# Altium PCB 6_LDCU_connector board(V21_zb).PcbDoc (part 4 of 4)
Units mil, origin at the board's own origin, x right, y up, seen from the top; angles counter-clockwise.
Board outline 11811.02 x 4135 mil, 2 copper layers (Top, Bottom), stack 12.7 mil thick; 37 components, 473 nets, 963 pads, 1 vias.
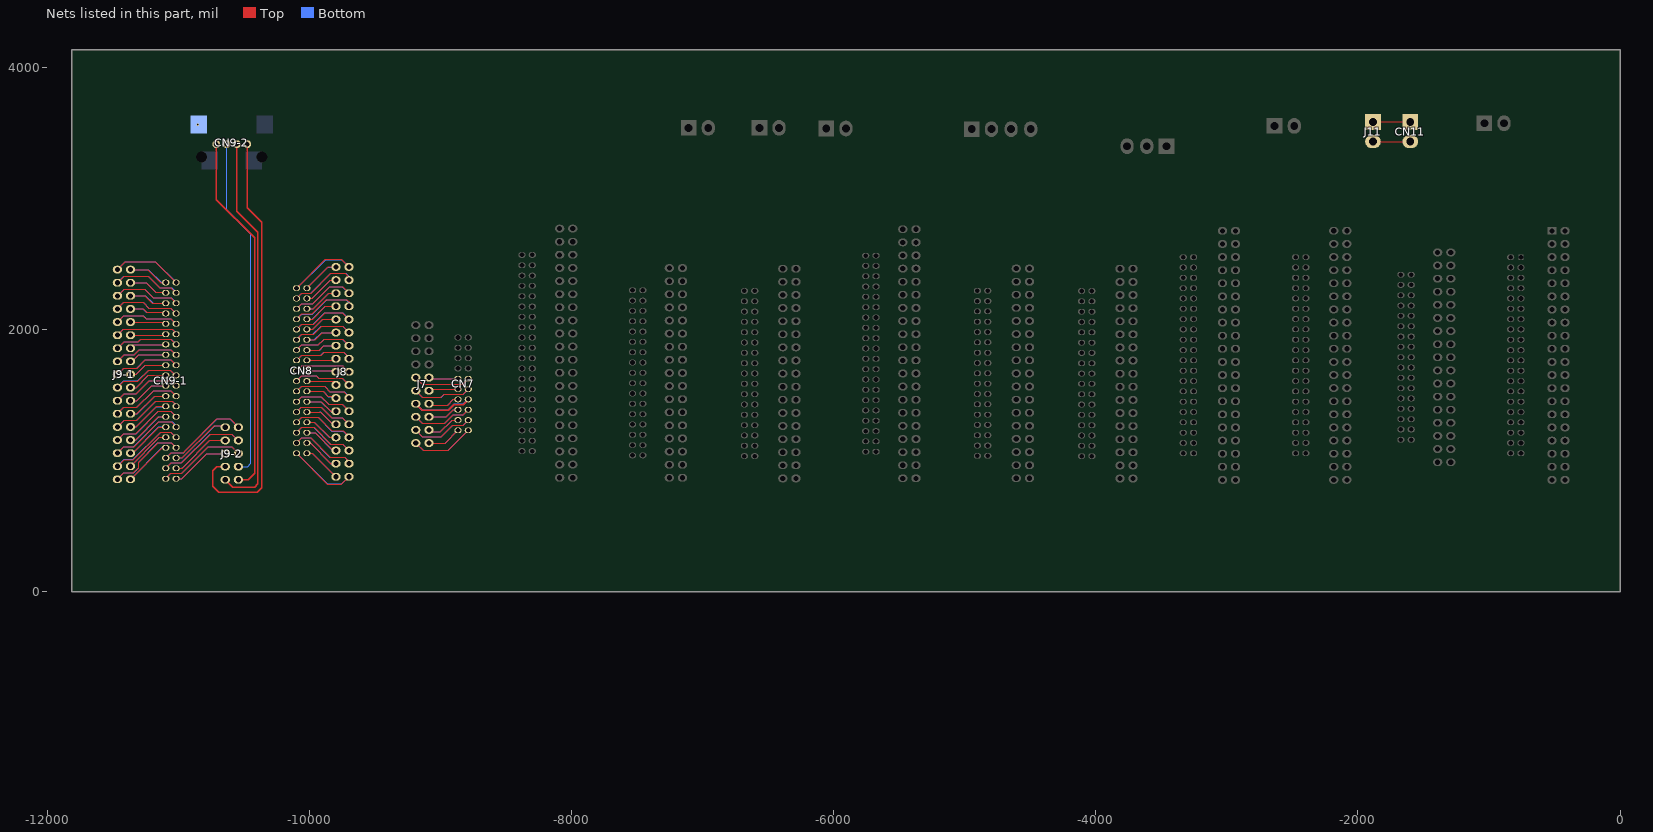
[diagram p4: the nets of this part, all layers, seen from the top]

## Via types
v1: diameter 20, hole 14, Top to Bottom, 1 vias

## Nets (pads, with @x,y where several pads share a name; then routed paths per layer and width w, separated by ;. In a path a pad name is that pad's centre, name@x,y a point inside that pad or via, vN(x,y) a via of type N, cw(c..) or ccw(c..) an arc to the next point about the centre after c; other vN are vias at no path point) (continued)
CN7_P9: CN7.9 J7.9 | length 876.5
  Top w7.87: J7.9@-9187.2,1635.32 -9136.81,1584.92 -8827.76,1584.92 CN7.9@-8786.81,1625.87
  Bottom w7.87: J7.9@-9187.2,1635.32 -9136.81,1584.92 -8827.76,1584.92 CN7.9@-8786.81,1625.87
CN7_P10: CN7.10 J7.10 | length 454.6
  Top w7.87: J7.10@-9087.2,1635.32 -9087.2,1630.98 -9082.09,1625.87 CN7.10@-8865.55,1625.87
  Bottom w7.87: J7.10@-9087.2,1635.32 -9079.33,1627.44 -9079.33,1625.87 CN7.10@-8865.55,1625.87
CN7_P11: CN7.11 J7.11 | length 894.7
  Top w7.87: J7.11@-9187.2,1535.32 -9136.42,1484.53 -8995.08,1484.53 -8971.85,1507.76 -8826.18,1507.76 CN7.11@-8786.81,1547.13
  Bottom w7.87: J7.11@-9187.2,1535.32 -9136.42,1484.53 -8994.29,1484.53 -8971.46,1507.36 -8826.57,1507.36 CN7.11@-8786.81,1547.13
CN7_P12: CN7.12 J7.12 | length 485.6
  Top w7.87: J7.12@-9087.2,1535.32 -9079.33,1527.44 -9074.21,1527.44 -9074.21,1547.13 CN7.12@-8865.55,1547.13
  Bottom w7.87: J7.12@-9087.2,1535.32 -9089.17,1533.35 -9089.17,1527.05 -9069.09,1547.13 CN7.12@-8865.55,1547.13
CN7_P13: CN7.13 J7.13 | length 951.1
  Top w7.87: -8815,1440.2 CN7.13@-8786.81,1468.39
  Top w10: J7.13@-9187.2,1435.32 -9137.2,1385.32 -8940.75,1385.32 -8897.05,1429.02 -8826.18,1429.02 -8815,1440.2 CN7.13@-8786.81,1468.39
  Bottom w10: J7.13@-9187.2,1435.32 -9136.89,1385 -8940,1385 -8895,1430 -8825,1430 CN7.13@-8786.81,1468.19
CN7_P14: CN7.14 J7.14 | length 499.2
  Top w7.87: J7.14@-9087.2,1435.32 -9076.97,1425.08 -8944.29,1425.08 -8900.98,1468.39 CN7.14@-8865.55,1468.39
  Bottom w7.87: J7.14@-9087.2,1435.32 -9091.14,1431.38 -9091.14,1425.08 -8943.9,1425.08 -8900.59,1468.39 CN7.14@-8865.55,1468.39
CN7_P15: CN7.15 J7.15 | length 929.4
  Top w7.87: J7.15@-9187.2,1335.32 -9138.39,1286.5 -8964.76,1286.5 -8901.5,1349.76 -8826.69,1349.76 ; -8827.36,1349.09 -8826.69,1349.76 ; CN7.15@-8786.81,1389.65 -8826.69,1349.76
  Bottom w7.87: J7.15@-9187.2,1335.32 -9138.78,1286.89 -8965.16,1286.89 -8902.28,1349.76 -8826.69,1349.76 ; -8828.15,1348.31 -8826.69,1349.76 ; CN7.15@-8786.81,1389.65 -8826.69,1349.76
CN7_P16: CN7.16 J7.16 | length 488.3
  Top w7.87: J7.16@-9087.2,1335.32 -8955.31,1335.32 -8900.98,1389.65 CN7.16@-8865.55,1389.65
  Bottom w7.87: J7.16@-9087.2,1335.32 -8955.71,1335.32 -8901.38,1389.65 CN7.16@-8865.55,1389.65
CN7_P17: CN7.17 J7.17 | length 947.2
  Top w7.87: J7.17@-9187.2,1235.32 -9136.81,1184.92 -8991.54,1184.92 -8904.92,1271.54 -8826.18,1271.54 CN7.17@-8786.81,1310.91
  Bottom w7.87: J7.17@-9187.2,1235.32 -9136.42,1184.53 -8991.54,1184.53 -8904.53,1271.54 -8826.18,1271.54 CN7.17@-8786.81,1310.91
CN7_P18: CN7.18 J7.18 | length 541.1
  Top w7.87: J7.18@-9087.2,1235.32 -9072.24,1220.35 -8999.41,1220.35 -8908.86,1310.91 CN7.18@-8865.55,1310.91
  Bottom w7.87: J7.18@-9087.2,1235.32 -9088.39,1234.13 -9088.39,1220.35 -8999.8,1220.35 -8909.25,1310.91 CN7.18@-8865.55,1310.91
CN7_P19: CN7.19 J7.19 | length 973
  Top w7.87: J7.19@-9187.2,1135.32 -9131.69,1079.8 -8939.17,1079.8 CN7.19@-8786.81,1232.17
  Bottom w7.87: J7.19@-9187.2,1135.32 -9131.69,1079.8 -8939.57,1079.8 -8787.2,1232.17 CN7.19@-8786.81,1232.17
CN7_P20: CN7.20 J7.20 | length 523.5
  Top w7.87: J7.20@-9087.2,1135.32 -8962.4,1135.32 CN7.20@-8865.55,1232.17
  Bottom w7.87: J7.20@-9087.2,1135.32 -8962.4,1135.32 CN7.20@-8865.55,1232.17
CN8_P1: CN8.1 J8.1 | length 577
  Top w7.87: CN8.1@-10018.31,2317.13 -9856.89,2478.54 J8.1@-9796.65,2478.54
  Bottom w7.87: CN8.1@-10018.31,2317.13 -9858.46,2476.97 -9798.23,2476.97 J8.1@-9796.65,2478.54
CN8_P2: CN8.2 J8.2 | length 1030.4
  Top w7.87: CN8.2@-10097.05,2317.13 -9876.57,2537.6 -9755.71,2537.6 J8.2@-9696.65,2478.54
  Bottom w7.87: CN8.2@-10097.05,2317.13 -10093.5,2317.13 -9875.39,2535.24 -9753.35,2535.24 J8.2@-9696.65,2478.54
CN8_P3: CN8.3 J8.3 | length 559.4
  Top w7.87: CN8.3@-10018.31,2238.39 -9978.94,2238.39 -9838.78,2378.54 J8.3@-9796.65,2378.54
  Bottom w7.87: CN8.3@-10018.31,2238.39 -9976.97,2238.39 -9839.17,2376.18 -9799.02,2376.18 J8.3@-9796.65,2378.54
CN8_P4: CN8.4 J8.4 | length 1031.7
  Top w7.87: CN8.4@-10097.05,2238.39 -10056.5,2278.94 -9985.63,2278.94 -9834.84,2429.72 -9725.39,2429.72 -9696.65,2400.98 J8.4@-9696.65,2378.54
  Bottom w7.87: CN8.4@-10097.05,2238.39 -10056.89,2278.54 -9987.99,2278.54 -9836.42,2430.12 -9721.06,2430.12 -9695.87,2404.92 -9695.87,2379.33 J8.4@-9696.65,2378.54
CN8_P5: CN8.5 J8.5 | length 541.8
  Top w7.87: CN8.5@-10018.31,2159.65 -9971.06,2159.65 -9852.17,2278.54 J8.5@-9796.65,2278.54
  Bottom w7.87: CN8.5@-10018.31,2159.65 -9971.06,2159.65 -9852.17,2278.54 J8.5@-9796.65,2278.54
CN8_P6: CN8.6 J8.6 | length 982
  Top w7.87: CN8.6@-10097.05,2159.65 -10057.68,2199.02 -9973.43,2199.02 -9844.29,2328.15 -9745.87,2328.15 -9703.35,2285.63 -9703.35,2285.24 J8.6@-9696.65,2278.54
  Bottom w7.87: CN8.6@-10097.05,2159.65 -10058.07,2198.62 -9975,2198.62 -9845.08,2328.54 -9746.65,2328.54 J8.6@-9696.65,2278.54
CN8_P7: CN8.7 J8.7 | length 524.2
  Top w7.87: CN8.7@-10018.31,2080.91 -9975,2080.91 -9877.36,2178.54 J8.7@-9796.65,2178.54
  Bottom w7.87: CN8.7@-10018.31,2080.91 -9976.97,2080.91 -9879.33,2178.54 J8.7@-9796.65,2178.54
CN8_P8: CN8.8 J8.8 | length 1013.8
  Top w7.87: CN8.8@-10097.05,2080.91 -10057.68,2120.28 -9978.94,2120.28 -9869.09,2230.12 -9714.76,2230.12 -9696.65,2212.01 J8.8@-9696.65,2178.54
  Bottom w7.87: CN8.8@-10097.05,2080.91 -10058.46,2119.49 -9978.94,2119.49 -9868.31,2230.12 -9719.09,2230.12 -9689.96,2200.98 -9689.96,2178.15 -9690.35,2178.54 J8.8@-9696.65,2178.54
CN8_P9: CN8.9 J8.9 | length 506.6
  Top w7.87: CN8.9@-10018.31,2002.17 -9973.43,2002.17 -9897.05,2078.54 J8.9@-9796.65,2078.54
  Bottom w7.87: CN8.9@-10018.31,2002.17 -9973.43,2002.17 -9897.05,2078.54 J8.9@-9796.65,2078.54
CN8_P10: CN8.10 J8.10 | length 949.1
  Top w7.87: CN8.10@-10097.05,2002.17 -10057.68,2041.54 -9967.13,2041.54 -9879.72,2128.94 -9747.05,2128.94 J8.10@-9696.65,2078.54
  Bottom w7.87: CN8.10@-10097.05,2002.17 -10058.07,2041.14 -9970.28,2041.14 -9882.87,2128.54 -9743.5,2128.54 -9696.65,2081.69 J8.10@-9696.65,2078.54
CN8_P11: CN8.11 J8.11 | length 489
  Top w7.87: CN8.11@-10018.31,1923.43 -9955.31,1923.43 -9900.2,1978.54 J8.11@-9796.65,1978.54
  Bottom w7.87: CN8.11@-10018.31,1923.43 -9961.22,1923.43 -9906.5,1978.15 -9797.05,1978.15 J8.11@-9796.65,1978.54
CN8_P12: CN8.12 J8.12 | length 928.6
  Top w7.87: CN8.12@-10097.05,1923.43 -10056.1,1964.37 -9967.52,1964.37 -9903.74,2028.15 -9746.26,2028.15 J8.12@-9696.65,1978.54
  Bottom w7.87: CN8.12@-10097.05,1923.43 -10056.89,1963.58 -9973.03,1963.58 -9908.46,2028.15 -9746.26,2028.15 J8.12@-9696.65,1978.54
CN8_P13: CN8.13 J8.13 | length 471.4
  Top w7.87: CN8.13@-10018.31,1844.69 -9925,1844.68 -9891.14,1878.54 J8.13@-9796.65,1878.54
  Bottom w7.87: CN8.13@-10018.31,1844.69 -9921.46,1844.68 -9887.6,1878.54 J8.13@-9796.65,1878.54
CN8_P14: CN8.14 J8.14 | length 911
  Top w7.87: CN8.14@-10097.05,1844.69 -10057.28,1884.45 -9930.12,1884.45 -9886.81,1927.76 -9745.87,1927.76 J8.14@-9696.65,1878.54
  Bottom w7.87: CN8.14@-10097.05,1844.69 -10057.68,1884.06 -9931.69,1884.06 -9887.2,1928.54 -9746.65,1928.54 J8.14@-9696.65,1878.54
CN8_P15: CN8.15 J8.15 | length 455.6
  Top w7.87: CN8.15@-10018.31,1765.94 -9809.25,1765.94 J8.15@-9796.65,1778.54
  Bottom w7.87: CN8.15@-10018.31,1765.94 -9806.1,1765.94 -9796.65,1775.39 J8.15@-9796.65,1778.54
CN8_P16: CN8.16 J8.16 | length 907.3
  Top w7.87: CN8.16@-10097.05,1765.94 -10057.28,1805.71 -9907.68,1805.71 -9884.84,1828.54 -9738.39,1828.54 -9696.65,1786.81 J8.16@-9696.65,1778.54
  Bottom w7.87: CN8.16@-10097.05,1765.94 -10057.28,1805.71 -9913.19,1805.71 -9889.17,1829.72 -9737.99,1829.72 -9694.69,1786.42 -9694.69,1780.51 J8.16@-9696.65,1778.54
CN8_P17: CN8.17 J8.17 | length 452.8
  Top w7.87: CN8.17@-10018.31,1687.2 -9805.31,1687.2 J8.17@-9796.65,1678.54
  Bottom w7.87: CN8.17@-10018.31,1687.2 -9801.38,1687.2 -9796.65,1682.48 J8.17@-9796.65,1678.54
CN8_P18: CN8.18 J8.18 | length 873.2
  Top w7.87: CN8.18@-10097.05,1687.2 -10057.68,1726.57 -9744.69,1726.57 J8.18@-9696.65,1678.54
  Bottom w7.87: CN8.18@-10097.05,1687.2 -10057.68,1726.57 -9744.69,1726.57 J8.18@-9696.65,1678.54
CN8_P19: CN8.19 J8.19 | length 505.7
  Top w7.87: CN8.19@-10018.31,1608.46 -9801.77,1608.46 -9786.02,1592.72 -9786.02,1589.17 J8.19@-9796.65,1578.54
  Bottom w7.87: CN8.19@-10018.31,1608.46 -9808.86,1608.46 -9808.86,1584.06 -9802.17,1584.06 J8.19@-9796.65,1578.54
CN8_P20: CN8.20 J8.20 | length 893.4
  Top w7.87: CN8.20@-10097.05,1608.46 -10056.1,1649.41 -9945.87,1649.41 -9926.97,1630.51 -9748.62,1630.51 J8.20@-9696.65,1578.54
  Bottom w7.87: CN8.20@-10097.05,1608.46 -10056.1,1649.41 -9945.87,1649.41 -9926.57,1630.12 -9748.23,1630.12 J8.20@-9696.65,1578.54
CN8_P21: CN8.21 J8.21 | length 492.2
  Top w7.87: CN8.21@-10018.31,1529.72 -9893.5,1529.72 -9858.07,1494.29 -9812.4,1494.29 J8.21@-9796.65,1478.54
  Bottom w7.87: CN8.21@-10018.31,1529.72 -9893.11,1529.72 -9853.74,1490.35 -9797.44,1490.35 -9796.65,1489.57 J8.21@-9796.65,1478.54
CN8_P22: CN8.22 J8.22 | length 932.1
  Top w7.87: CN8.22@-10097.05,1529.72 -10057.28,1569.49 -9883.27,1569.49 -9841.93,1528.15 -9737.2,1528.15 -9696.65,1487.6 J8.22@-9696.65,1478.54
  Bottom w7.87: CN8.22@-10097.05,1529.72 -10057.68,1569.09 -9883.66,1569.09 -9842.72,1528.15 -9732.87,1528.15 -9698.62,1493.9 -9698.62,1473.43 -9696.65,1475.39 J8.22@-9696.65,1478.54
CN8_P23: CN8.23 J8.23 | length 507.9
  Top w7.87: CN8.23@-10018.31,1450.98 -9909.65,1450.98 -9837.2,1378.54 J8.23@-9796.65,1378.54
  Bottom w7.87: CN8.23@-10018.31,1450.98 -9910.43,1450.98 -9832.48,1373.03 -9802.17,1373.03 J8.23@-9796.65,1378.54
CN8_P24: CN8.24 J8.24 | length 926
  Top w7.87: CN8.24@-10097.05,1450.98 -10057.68,1490.35 -9909.65,1490.35 -9849.41,1430.12 -9748.23,1430.12 J8.24@-9696.65,1378.54
  Bottom w7.87: CN8.24@-10097.05,1450.98 -10057.68,1490.35 -9910.43,1490.35 -9850.2,1430.12 -9748.23,1430.12 J8.24@-9696.65,1378.54
CN8_P25: CN8.25 J8.25 | length 521.3
  Top w7.87: CN8.25@-10018.31,1372.24 -9913.58,1372.24 -9826.97,1285.63 -9803.74,1285.63 J8.25@-9796.65,1278.54
  Bottom w7.87: CN8.25@-10018.31,1372.24 -9917.13,1372.24 -9916.73,1372.64 -9822.64,1278.54 J8.25@-9796.65,1278.54
CN8_P26: CN8.26 J8.26 | length 941
  Top w7.87: CN8.26@-10097.05,1372.24 -10059.29,1410 -9908.82,1410 -9827.76,1328.94 -9747.05,1328.94 J8.26@-9696.65,1278.54
  Bottom w7.87: CN8.26@-10097.05,1372.24 -10059.29,1410 -9908.43,1410 -9827.76,1329.33 -9747.44,1329.33 J8.26@-9696.65,1278.54
CN8_P27: CN8.27 J8.27 | length 539.8
  Top w7.87: CN8.27@-10018.31,1293.5 -9960.43,1293.5 -9845.47,1178.54 J8.27@-9796.65,1178.54
  Bottom w7.87: CN8.27@-10018.31,1293.5 -10015.55,1293.5 -10013.98,1295.08 -9962.8,1295.08 -9846.26,1178.54 J8.27@-9796.65,1178.54
CN8_P28: CN8.28 J8.28 | length 968.6
  Top w7.87: CN8.28@-10097.05,1293.5 -10058.46,1332.09 -9932.48,1332.09 -9828.15,1227.76 -9739.96,1227.76 -9696.65,1184.45 J8.28@-9696.65,1178.54
  Bottom w7.87: CN8.28@-10097.05,1293.5 -10058.86,1331.69 -9932.48,1331.69 -9828.15,1227.36 -9739.96,1227.36 -9693.9,1181.3 J8.28@-9696.65,1178.54
CN8_P29: CN8.29 J8.29 | length 560.7
  Top w7.87: CN8.29@-10018.31,1214.76 -9955.31,1214.76 -9813.58,1073.03 -9808.07,1078.54 J8.29@-9796.65,1078.54
  Bottom w7.87: CN8.29@-10018.31,1214.76 -9956.1,1214.76 -9951.38,1210.04 -9819.88,1078.54 J8.29@-9796.65,1078.54
CN8_P30: CN8.30 J8.30 | length 979.2
  Top w7.87: CN8.30@-10097.05,1214.76 -10057.68,1254.13 -9962.01,1254.13 -9836.02,1128.15 -9746.26,1128.15 J8.30@-9696.65,1078.54
  Bottom w7.87: CN8.30@-10097.05,1214.76 -10057.28,1254.53 -9964.76,1254.53 -9838.39,1128.15 -9746.26,1128.15 J8.30@-9696.65,1078.54
CN8_P31: CN8.31 J8.31 | length 573.8
  Top w7.87: CN8.31@-10018.31,1136.02 -9993.9,1136.02 -9836.42,978.54 J8.31@-9796.65,978.54
  Bottom w7.87: CN8.31@-10018.31,1136.02 -9992.72,1136.02 -9835.24,978.54 J8.31@-9796.65,978.54
CN8_P32: CN8.32 J8.32 | length 1028
  Top w7.87: CN8.32@-10097.05,1136.02 -10057.68,1175.39 -9988.78,1175.39 -9841.54,1028.15 -9729.33,1028.15 -9696.65,995.47 J8.32@-9696.65,978.54
  Bottom w7.87: CN8.32@-10097.05,1136.02 -10057.28,1175.79 -9989.57,1175.79 -9842.32,1028.54 -9728.94,1028.54 -9686.02,985.63 -9693.11,978.54 J8.32@-9696.65,978.54
CN8_P33: CN8.33 J8.33 | length 591.4
  Top w7.87: CN8.33@-10018.31,1057.28 -9975.39,1057.28 J8.33@-9796.65,878.54
  Bottom w7.87: CN8.33@-10018.31,1057.28 -9975.39,1057.28 J8.33@-9796.65,878.54
CN8_P34: CN8.34 J8.34 | length 1042.1
  Top w7.87: CN8.34@-10097.05,1057.28 -9860.83,821.06 -9754.13,821.06 J8.34@-9696.65,878.54
  Bottom w7.87: CN8.34@-10097.05,1057.28 -9863.19,823.43 -9751.77,823.43 J8.34@-9696.65,878.54
CN9-2_P1: CN9-2.1 J9-2.7 | length 3302.8
  Top w10: J9-2.7@-10640.75,955.63 -10705.39,955.63 -10736.02,925 -10736.02,805 -10691.02,760 -10396.02,760 -10361.02,795 -10361.02,2820 -10472.91,2931.89 CN9-2.1@-10472.91,3415.39
CN9-2_P2: CN9-2.2 J9-2.9 | length 2940.1
  Top w10: J9-2.9@-10640.75,855.63 -10585.12,800 -10416.02,800 -10391.02,825 -10391.02,2745 -10551.65,2905.63 CN9-2.2@-10551.65,3415.39
CN9-2_P3: CN9-2.3 J9-2.8 | length 2616.6
  Bottom w7.87: CN9-2.3@-10630.39,3415.39 -10630.39,2914.37 -10446.02,2730 -10446.02,980 -10470.39,955.63 J9-2.8@-10540.75,955.63
CN9-2_P4: CN9-2.4 J9-2.10 | length 2777
  Top w10: CN9-2.4@-10709.13,3415.39 -10709.13,2993.11 -10416.02,2700 -10416.02,905 -10465.39,855.63 J9-2.10@-10540.75,855.63
CN9_P1: CN9-1.1 J9-1.1 | length 1080.3
  Top w7.87: J9-1.1@-11463.58,2458.54 -11463.58,2459.33 -11402.91,2520 -11175.83,2520 CN9-1.1@-11015.94,2360.12
  Bottom w7.87: J9-1.1@-11463.58,2458.54 -11401.77,2520.35 -11174.61,2520.35 -11015.94,2361.69 CN9-1.1@-11015.94,2360.12
CN9_P2: CN9-1.2 J9-1.2 | length 621.9
  Top w7.87: J9-1.2@-11363.58,2458.54 -11230.91,2458.54 -11132.48,2360.12 CN9-1.2@-11094.69,2360.12
  Bottom w7.87: J9-1.2@-11363.58,2458.54 -11227.76,2458.54 -11126.18,2356.97 -11097.83,2356.97 CN9-1.2@-11094.69,2360.12
CN9_P3: CN9-1.3 J9-1.3 | length 1044.6
  Top w7.87: J9-1.3@-11463.58,2358.54 -11412.8,2409.33 -11229.33,2409.33 -11141.14,2321.14 -11055.71,2321.14 CN9-1.3@-11015.94,2281.38
  Bottom w7.87: J9-1.3@-11463.58,2358.54 -11415.16,2406.97 -11226.57,2406.97 -11140.35,2320.75 -11049.8,2320.75 -11015.94,2286.89 CN9-1.3@-11015.94,2281.38
CN9_P4: CN9-1.4 J9-1.4 | length 603.3
  Top w7.87: J9-1.4@-11363.58,2358.54 -11244.29,2358.54 -11171.06,2285.32 -11098.62,2285.32 CN9-1.4@-11094.69,2281.38
  Bottom w7.87: J9-1.4@-11363.58,2358.54 -11245.08,2358.54 -11170.67,2284.13 -11094.69,2284.13 CN9-1.4@-11094.69,2281.38
CN9_P5: CN9-1.5 J9-1.5 | length 1029.1
  Top w7.87: J9-1.5@-11463.58,2258.54 -11412.8,2309.33 -11256.1,2309.33 -11189.96,2243.19 -11056.5,2243.19 CN9-1.5@-11015.94,2202.64
  Bottom w7.87: J9-1.5@-11463.58,2258.54 -11412.8,2309.33 -11254.92,2309.33 -11188.39,2242.8 -11050.98,2242.8 -11015.55,2207.36 -11015.55,2203.03 CN9-1.5@-11015.94,2202.64
CN9_P6: CN9-1.6 J9-1.6 | length 593.9
  Top w7.87: J9-1.6@-11363.58,2258.54 -11254.53,2258.54 -11198.62,2202.64 CN9-1.6@-11094.69,2202.64
  Bottom w7.87: J9-1.6@-11363.58,2258.54 -11249.41,2258.54 -11191.14,2200.28 -11090.75,2200.28 -11093.11,2202.64 CN9-1.6@-11094.69,2202.64
CN9_P7: CN9-1.7 J9-1.7 | length 1006.2
  Top w7.87: J9-1.7@-11463.58,2158.54 -11413.98,2208.15 -11266.73,2208.15 -11223.43,2164.84 -11056.89,2164.84 CN9-1.7@-11015.94,2123.9
  Bottom w7.87: J9-1.7@-11463.58,2158.54 -11413.98,2208.15 -11267.13,2208.15 -11223.82,2164.84 -11056.89,2164.84 CN9-1.7@-11015.94,2123.9
CN9_P8: CN9-1.8 J9-1.8 | length 567.9
  Top w7.87: J9-1.8@-11363.58,2158.54 -11267.52,2158.54 -11240.75,2131.77 -11102.56,2131.77 CN9-1.8@-11094.69,2123.9
  Bottom w7.87: J9-1.8@-11363.58,2158.54 -11268.31,2158.54 -11243.9,2134.13 -11102.56,2134.13 -11094.69,2126.26 CN9-1.8@-11094.69,2123.9
CN9_P9: CN9-1.9 J9-1.9 | length 987.6
  Top w7.87: J9-1.9@-11463.58,2058.54 -11414.37,2107.76 -11268.31,2107.76 -11245.08,2084.53 -11055.31,2084.53 CN9-1.9@-11015.94,2045.16
  Bottom w7.87: J9-1.9@-11463.58,2058.54 -11414.76,2107.36 -11265.16,2107.36 -11242.32,2084.53 -11055.31,2084.53 CN9-1.9@-11015.94,2045.16
CN9_P10: CN9-1.10 J9-1.10 | length 551.7
  Top w7.87: J9-1.10@-11363.58,2058.54 -11108.07,2058.54 CN9-1.10@-11094.69,2045.16
  Bottom w7.87: J9-1.10@-11363.58,2058.54 -11103.35,2058.54 -11094.69,2049.88 CN9-1.10@-11094.69,2045.16
CN9_P11: CN9-1.11 J9-1.11 | length 975.6
  Top w7.87: J9-1.11@-11463.58,1958.54 -11417.13,2005 -11046.65,2005 -11015.94,1974.29 CN9-1.11@-11015.94,1966.42
  Bottom w7.87: J9-1.11@-11463.58,1958.54 -11417.13,2005 -11045.47,2005 -11015.94,1975.47 CN9-1.11@-11015.94,1966.42
CN9_P12: CN9-1.12 J9-1.12 | length 548.9
  Top w7.87: J9-1.12@-11363.58,1958.54 -11102.56,1958.54 CN9-1.12@-11094.69,1966.42
  Bottom w7.87: J9-1.12@-11363.58,1958.54 -11094.69,1958.54 CN9-1.12@-11094.69,1966.42
CN9_P13: CN9-1.13 J9-1.13 | length 989.4
  Top w7.87: J9-1.13@-11463.58,1858.54 -11412.01,1910.12 -11304.53,1910.12 -11287.2,1927.44 -11055.71,1927.44 CN9-1.13@-11015.94,1887.68
  Bottom w7.87: J9-1.13@-11463.58,1858.54 -11412.01,1910.12 -11304.13,1910.12 -11286.02,1928.23 -11052.56,1928.23 -11019.49,1895.16 -11019.49,1889.25 -11017.52,1889.25 CN9-1.13@-11015.94,1887.68
CN9_P14: CN9-1.14 J9-1.14 | length 561.9
  Top w7.87: J9-1.14@-11363.58,1858.54 -11337.99,1884.13 -11098.23,1884.13 CN9-1.14@-11094.69,1887.68
  Bottom w7.87: J9-1.14@-11363.58,1858.54 -11337.2,1884.92 -11097.44,1884.92 CN9-1.14@-11094.69,1887.68
CN9_P15: CN9-1.15 J9-1.15 | length 1003.6
  Top w7.87: J9-1.15@-11463.58,1758.54 -11411.61,1810.51 -11335.63,1810.51 -11297.05,1849.09 -11056.1,1849.09 CN9-1.15@-11015.94,1808.94
  Bottom w7.87: J9-1.15@-11463.58,1758.54 -11411.22,1810.91 -11334.45,1810.91 -11296.26,1849.09 -11056.1,1849.09 CN9-1.15@-11015.94,1808.94
CN9_P16: CN9-1.16 J9-1.16 | length 581.5
  Top w7.87: J9-1.16@-11363.58,1758.54 -11351.38,1758.54 -11300.98,1808.94 CN9-1.16@-11094.69,1808.94
  Bottom w7.87: J9-1.16@-11363.58,1758.54 -11356.1,1758.54 -11353.74,1756.18 -11300.98,1808.94 CN9-1.16@-11094.69,1808.94
CN9_P17: CN9-1.17 J9-1.17 | length 1020.8
  Top w7.87: J9-1.17@-11463.58,1658.54 -11414.76,1707.36 -11312.4,1707.36 -11249.41,1770.35 -11056.1,1770.35 CN9-1.17@-11015.94,1730.2
  Bottom w7.87: J9-1.17@-11463.58,1658.54 -11415.16,1706.97 -11314.37,1706.97 -11251.38,1769.96 -11055.71,1769.96 CN9-1.17@-11015.94,1730.2
CN9_P18: CN9-1.18 J9-1.18 | length 597.2
  Top w7.87: J9-1.18@-11363.58,1658.54 -11321.06,1658.54 -11249.41,1730.2 CN9-1.18@-11094.69,1730.2
  Bottom w7.87: J9-1.18@-11363.58,1658.54 -11321.46,1658.54 -11251.38,1728.62 -11096.26,1728.62 CN9-1.18@-11094.69,1730.2
CN9_P19: CN9-1.19 J9-1.19 | length 1037.8
  Top w7.87: J9-1.19@-11463.58,1558.54 -11413.58,1608.54 -11307.68,1608.54 -11225.39,1690.83 -11059.25,1690.83 -11039.57,1671.14 -11035.63,1671.14 CN9-1.19@-11015.94,1651.46
  Bottom w7.87: J9-1.19@-11463.58,1558.54 -11413.19,1608.94 -11306.5,1608.94 -11224.61,1690.83 -11061.61,1690.83 -11021.85,1651.06 -11016.34,1651.06 CN9-1.19@-11015.94,1651.46
CN9_P20: CN9-1.20 J9-1.20 | length 615.1
  Top w7.87: J9-1.20@-11363.58,1558.54 -11320.67,1558.54 -11227.76,1651.46 CN9-1.20@-11094.69,1651.46
  Bottom w7.87: J9-1.20@-11363.58,1558.54 -11320.67,1558.54 -11227.36,1651.85 -11095.08,1651.85 CN9-1.20@-11094.69,1651.46
CN9_P21: CN9-1.21 J9-1.21 | length 1055.1
  Top w7.87: J9-1.21@-11463.58,1458.54 -11412.4,1509.72 -11321.46,1509.72 -11218.7,1612.48 -11055.71,1612.48 CN9-1.21@-11015.94,1572.72
  Bottom w7.87: J9-1.21@-11463.58,1458.54 -11412.4,1509.72 -11321.06,1509.72 -11219.09,1611.69 -11058.46,1611.69 -11025.39,1578.62 -11021.85,1578.62 CN9-1.21@-11015.94,1572.72
CN9_P22: CN9-1.22 J9-1.22 | length 632.7
  Top w7.87: J9-1.22@-11363.58,1458.54 -11315.16,1458.54 -11200.98,1572.72 CN9-1.22@-11094.69,1572.72
  Bottom w7.87: J9-1.22@-11363.58,1458.54 -11314.76,1458.54 -11200.2,1573.11 -11095.08,1573.11 CN9-1.22@-11094.69,1572.72
CN9_P23: CN9-1.23 J9-1.23 | length 1075.4
  Top w7.87: J9-1.23@-11463.58,1358.54 -11414.76,1407.36 -11315.16,1407.36 -11187.99,1534.53 -11056.5,1534.53 CN9-1.23@-11015.94,1493.98
  Bottom w7.87: J9-1.23@-11463.58,1358.54 -11415.16,1406.97 -11315.55,1406.97 -11187.99,1534.53 -11055.31,1534.53 -11015.94,1495.16 CN9-1.23@-11015.94,1493.98
CN9_P24: CN9-1.24 J9-1.24 | length 650
  Top w7.87: J9-1.24@-11363.58,1358.54 -11315.16,1358.54 -11179.72,1493.98 CN9-1.24@-11094.69,1493.98
  Bottom w7.87: J9-1.24@-11363.58,1358.54 -11312.4,1358.54 -11176.97,1493.98 CN9-1.24@-11094.69,1493.98
CN9_P25: CN9-1.25 J9-1.25 | length 1115.2
  Top w7.87: J9-1.25@-11463.58,1258.54 -11412.8,1309.33 -11315.94,1309.33 -11170.28,1455 -11043.9,1455 -11015.94,1427.05 CN9-1.25@-11015.94,1415.24
  Bottom w7.87: J9-1.25@-11463.58,1258.54 -11412.8,1309.33 -11317.13,1309.33 -11171.06,1455.39 -11044.29,1455.39 -11011.61,1422.72 -11011.61,1412.48 -11014.37,1415.24 CN9-1.25@-11015.94,1415.24
CN9_P26: CN9-1.26 J9-1.26 | length 667.6
  Top w7.87: J9-1.26@-11363.58,1258.54 -11319.09,1258.54 -11162.4,1415.24 CN9-1.26@-11094.69,1415.24
  Bottom w7.87: J9-1.26@-11363.58,1258.54 -11320.28,1258.54 -11165.55,1413.27 -11096.65,1413.27 CN9-1.26@-11094.69,1415.24
CN9_P27: CN9-1.27 J9-1.27 | length 1109.2
  Top w7.87: J9-1.27@-11463.58,1158.54 -11415.55,1206.57 -11323.03,1206.57 -11152.95,1376.65 -11056.1,1376.65 CN9-1.27@-11015.94,1336.5
  Bottom w7.87: J9-1.27@-11463.58,1158.54 -11414.76,1207.36 -11320.28,1207.36 -11150.98,1376.65 -11056.1,1376.65 CN9-1.27@-11015.94,1336.5
CN9_P28: CN9-1.28 J9-1.28 | length 685.2
  Top w7.87: J9-1.28@-11363.58,1158.54 -11327.36,1158.54 -11150.2,1335.71 -11095.47,1335.71 CN9-1.28@-11094.69,1336.5
  Bottom w7.87: J9-1.28@-11363.58,1158.54 -11325.39,1158.54 -11147.83,1336.1 -11095.08,1336.1 CN9-1.28@-11094.69,1336.5
CN9_P29: CN9-1.29 J9-1.29 | length 1134.9
  Top w7.87: J9-1.29@-11463.58,1058.54 -11413.58,1108.54 -11334.84,1108.54 -11146.26,1297.13 -11051.38,1297.13 -11015.94,1261.69 CN9-1.29@-11015.94,1257.76
  Bottom w7.87: J9-1.29@-11463.58,1058.54 -11414.37,1107.76 -11337.2,1107.76 -11147.83,1297.13 -11046.65,1297.13 -11013.58,1264.06 -11013.58,1260.12 CN9-1.29@-11015.94,1257.76
CN9_P30: CN9-1.30 J9-1.30 | length 710.4
  Top w7.87: J9-1.30@-11363.58,1058.54 -11334.84,1058.54 -11334.84,1070.35 -11147.44,1257.76 CN9-1.30@-11094.69,1257.76
  Bottom w7.87: J9-1.30@-11363.58,1058.54 -11347.05,1058.54 -11147.05,1258.54 -11095.47,1258.54 CN9-1.30@-11094.69,1257.76
CN9_P31: CN9-1.31 J9-1.31 | length 1144.1
  Top w7.87: J9-1.31@-11463.58,958.54 -11412.4,1009.72 -11341.93,1009.72 -11132.87,1218.78 -11055.71,1218.78 CN9-1.31@-11015.94,1179.02
  Bottom w7.87: J9-1.31@-11463.58,958.54 -11412.01,1010.12 -11340.75,1010.12 -11131.69,1219.17 -11056.1,1219.17 CN9-1.31@-11015.94,1179.02
CN9_P32: CN9-1.32 J9-1.32 | length 720.4
  Top w7.87: J9-1.32@-11363.58,958.54 -11143.11,1179.02 CN9-1.32@-11094.69,1179.02
  Bottom w7.87: J9-1.32@-11363.58,958.54 -11143.11,1179.02 CN9-1.32@-11094.69,1179.02
CN9_P33: CN9-1.33 J9-1.33 | length 1210.2
  Top w7.87: J9-1.33@-11463.58,858.54 -11413.58,908.54 -11341.54,908.54 -11302.56,947.52 -11302.56,990.04 -11153.74,1138.86 -11054.53,1138.86 CN9-1.33@-11015.94,1100.28
  Bottom w7.87: J9-1.33@-11463.58,858.54 -11413.58,908.54 -11340.35,908.54 -11302.56,946.34 -11302.56,990.43 -11154.13,1138.86 -11054.53,1138.86 CN9-1.33@-11015.94,1100.28
CN9_P34: CN9-1.34 J9-1.34 | length 748.2
  Top w7.87: J9-1.34@-11363.58,858.54 -11117.91,1104.21 -11098.62,1104.21 CN9-1.34@-11094.69,1100.28
  Bottom w7.87: J9-1.34@-11363.58,858.54 -11116.34,1105.79 -11108.07,1097.52 -11097.44,1097.52 CN9-1.34@-11094.69,1100.28
CN9_P35: CN9-1.35 J9-2.1 | length 966.1
  Top w7.87: CN9-1.35@-11015.94,1021.54 -10969.72,1021.54 -10723.82,1267.44 -10652.56,1267.44 J9-2.1@-10640.75,1255.63
  Bottom w7.87: CN9-1.35@-11015.94,1021.54 -10968.94,1021.54 -10722.64,1267.83 -10649.8,1267.83 -10640.75,1258.78 J9-2.1@-10640.75,1255.63
CN9_P36: CN9-1.36 J9-2.2 | length 1407.5
  Top w7.87: CN9-1.36@-11094.69,1021.54 -11054.13,1062.09 -10961.46,1062.09 -10928.54,1095 -10704.53,1319.02 -10604.13,1319.02 J9-2.2@-10540.75,1255.63
  Bottom w7.87: CN9-1.36@-11094.69,1021.54 -11053.74,1062.48 -10958.7,1062.48 -10945,1076.18 -10701.38,1319.8 -10604.92,1319.8 J9-2.2@-10540.75,1255.63
CN9_P37: CN9-1.37 J9-2.3 | length 953.4
  Top w7.87: CN9-1.37@-11015.94,942.8 -10970.51,942.8 ; J9-2.3@-10640.75,1155.63 -10757.68,1155.63 -10951.65,961.65 ; -10970.51,942.8 -10951.65,961.65 ; -10970.51,942.8 -10951.65,961.65
  Bottom w7.87: CN9-1.37@-11015.94,942.8 -10971.69,942.8 -10955,959.49 -10758.86,1155.63 J9-2.3@-10640.75,1155.63
CN9_P38: CN9-1.38 J9-2.4 | length 1365.1
  Top w7.87: CN9-1.38@-11094.69,942.8 -11053.74,983.74 -10972.87,983.74 -10960,996.61 -10752.17,1204.45 -10589.57,1204.45 J9-2.4@-10540.75,1155.63
  Bottom w7.87: CN9-1.38@-11094.69,942.8 -11053.74,983.74 -10975.63,983.74 -10754.92,1204.45 -10589.57,1204.45 J9-2.4@-10540.75,1155.63
CN9_P39: CN9-1.39 J9-2.5 | length 909.1
  Top w7.87: CN9-1.39@-11015.94,864.06 -10974.06,864.06 -10782.48,1055.63 J9-2.5@-10640.75,1055.63
  Bottom w7.87: CN9-1.39@-11015.94,864.06 -10974.06,864.06 -10782.48,1055.63 J9-2.5@-10640.75,1055.63
CN9_P40: CN9-1.40 J9-2.6 | length 1350.7
  Top w7.87: CN9-1.40@-11094.69,864.06 -11054.92,903.82 -10973.66,903.82 -10771.06,1106.42 -10591.54,1106.42 J9-2.6@-10540.75,1055.63
  Bottom w7.87: CN9-1.40@-11094.69,864.06 -11054.92,903.82 -10973.66,903.82 -10771.06,1106.42 -10591.54,1106.42 J9-2.6@-10540.75,1055.63
CN11-2_P1: CN11.1 J11.1 | length 285
  Top w7.87: J11.1@-1886.02,3585 CN11.1@-1601.02,3585
CN11-2_P2: CN11.2 J11.2 | length 285
  Top w7.87: J11.2@-1886.02,3435 CN11.2@-1601.02,3435
CN11-2_P3: 
CN11-2_P4: 
GND: CN9-2.8
  other v1: -10850,3565
pads on no net: CN9-2.5 CN9-2.6 CN9-2.7 CN9-2.9 CN9-2.10 J1-1.28 J1-1.30 J2-2.30 J3.23 J3.25 J3.35 J5-1.7 J5-1.9 J5-1.10 J5-1.12 J5-1.16 J5-1.18 J5-1.33 J5-1.34 J5-2.5 J12.2
copper on no net: | length 26334.6
  Top w10: -9939.41,-412.4 -3171.69,-412.4 ; -9877.99,-1454.53 -3164.61,-1454.53 ; -9868.15,-939.57 -3181.14,-939.57 ; -8832.91,-1451.85 -8832.91,-412.87 ; -7911.06,-1441.54 -7911.06,-422.64 ; -7211.85,-1460.04 -7211.85,-432.87 ; -5804.37,-1454.13 -5804.37,-426.97 ; -4944.13,-1449.8 -4944.13,-422.64 ; -4078.98,-1445.47 -4078.98,-418.31

## Polygon pours and split planes (outlines as drawn)
GND on Bottom "Bottom Layer-No Net" (solid, remove dead copper, pour order 4): -11811.02,4133.86 -11585,4133.86 0,4133.86 0,4065 0,0 -85,0 -11811.02,0 -11810,1.02 -11810,70 -11810,4132.83 -11811.02,4133.86
GND on Top "Bottom Layer-No Net" (solid, remove dead copper, pour order 3): -11811.3,4140.3 -11585.28,4140.3 -0.28,4140.3 -0.28,4071.45 -0.28,6.45 -85.28,6.45 -11811.3,6.45 -11810.28,7.47 -11810.28,76.45 -11810.28,4139.28 -11811.3,4140.3

## Keep-outs
Keep-Out Layer:
  circle w10: c-11643.31,188.98 r64.96
  circle w10: c-9931.5,188.98 r64.96
  circle w10: c-7940.55,188.98 r64.96
  circle w10: c-5939.37,188.98 r64.96
  circle w10: c-4079.13,188.98 r64.96
  circle w10: c-1840.16,188.98 r64.96
  circle w10: c-229.13,188.98 r64.96
  circle w10: c-229.13,3925.98 r64.96
  circle w10: c-5939.37,3925.98 r64.96
  circle w10: c-4079.13,3925.98 r64.96
  circle w10: c-7928.74,3925.98 r64.96
  circle w10: c-9931.5,3925.98 r64.96
  circle w10: c-1840.16,3925.98 r64.96
  circle w10: c-11643.31,3925.98 r64.96
  lines w10: -11811.02,0 0,0 0,4133.86 -11811.02,4133.86 -11811.02,0

## Other copper
Top:
  text "sold mask" at -3979.17,-687.2 h196.85
  text "screen" at -8698.74,-697.05 h98.43
  text "copper" at -7799.25,-702.95 h196.85
  text "工艺" at -4683.5,-708.46 h196.85
  text "layer" at -9485,-715 h98.43
  text "PCB Thickness" at -6955,-715 h98.43
  text "材质" at -5552.8,-720.67 h196.85
  text "喷锡" at -4674.06,-1221.85 h196.85
  text "FR4" at -5516.97,-1229.72 h98.43
  text "过孔盖油" at -3955,-1230 h196.85
  text "1oz" at -7755,-1250 h314.96
  text "1.6mm" at -6917.76,-1256.5 h314.96
  text "绿油白字" at -8725,-1260 h196.85
  text "2" at -9365,-1275 h98.43

## Silkscreen, mask and mechanical layers (free items; w line width, h text height)
Silkscreen Top:
  text "E-CAN" at -2655,3760 h40
  text "C-CAN" at -1070,3760 h40
  text "WakeUp" at -3741.02,3745 h40
  text "LIN" at -4786.02,3735 h40
  text "P-CAN" at -7126.02,3730 h40
  text "I-CAN" at -6606.02,3725 h40
  text "B-CAN" at -6081.02,3720 h40
  text "YC-0099" at -9405,3605 h60
  text "SIS" at -9670,3600 h71.81
  text "2023-04-07" at -8925,3600 h40
  text "H93 EOL LDCU Connector Board V21" at -9676.02,3470 h60
  text "LIN_AGS" at -4505,3360 h40 r270
  text "LIN_RFR" at -4970,3355 h40 r270
  text "LIN_PWS" at -4810,3355 h40 r270
  text "LIN_FKS" at -4655,3355 h40 r270
  text "CAR ETH" at -1805,3250 h40
  text "J2-1" at -3856.02,3165 h40
  text "J1-6" at -3516.02,3160 h40
  text "1" at -5668.46,2777.28 h50 r270
  text "1" at -8305.59,2775.98 h50 r270
  text "1" at -2397.05,2774.61 h50 r270
  text "1" at -3233.03,2768.03 h50 r270
  text "1" at -711.02,2760 h50 r270
  text "1" at -8305,2625 h40
  text "1" at -5677.2,2610 h40
  text "1" at -3260,2605 h40
  text "1" at -2400,2600 h40
  text "1" at -765,2600 h40
  text "1" at -1600.75,2598.31 h50 r270
  text "1" at -7453.15,2479.76 h50 r270
  text "1" at -4029.13,2478.43 h50 r270
  text "1" at -4811.89,2475.71 h50 r270
  text "1" at -6590.43,2473.98 h50 r270
  text "4" at -8480,2470 h40
  text "4" at -5865,2470 h40
  text "1" at -11598.23,2461.69 h50 r90
  text "1" at -1600,2460 h40
  text "1" at -9960,2455 h50
  text "4" at -3440,2455 h40
  text "4" at -2595,2455 h40
  text "4" at -950,2450 h40
  text "1" at -10025,2370 h40
  text "1" at -4040,2355 h40
  text "1" at -10965,2345 h40
  text "1" at -7460,2345 h40
  text "1" at -6605,2345 h40
  text "1" at -4830,2345 h40
  text "4" at -1775,2330 h40
  text "8" at -8480,2310 h40
  text "8" at -5865,2310 h40
  text "8" at -3440,2295 h40
  text "8" at -2595,2295 h40
  text "8" at -950,2290 h40
  text "4" at -11185,2265 h40
  text "4" at -10200,2220 h40
  text "4" at -7640,2205 h40
  text "4" at -6795,2205 h40
  text "4" at -5005,2205 h40
  text "4" at -4215,2205 h40
  text "5" at -10965,2180 h40
  text "8" at -1775,2170 h40
  text "12" at -8500,2150 h40
  text "12" at -5885,2150 h40
  text "12" at -3460,2135 h40
  text "12" at -2615,2135 h40
  text "12" at -970,2130 h40
  text "8" at -11185,2105 h40
  text "8" at -10200,2060 h40
  text "8" at -7640,2045 h40
  text "8" at -6795,2045 h40
  text "8" at -5005,2045 h40
  text "8" at -4215,2045 h40
  text "1" at -9309.25,2036.1 h50 r90
  text "9" at -10965,2025 h40
  text "12" at -1795,2010 h40
  text "16" at -8505,2000 h40
  text "16" at -5890,2000 h40
  text "2" at -8885,1985 h40
  text "16" at -3465,1985 h40
  text "16" at -2620,1985 h40
  text "16" at -975,1980 h40
  text "12" at -11205,1945 h40
  text "1" at -8715,1930 h40
  text "12" at -10220,1900 h40
  text "12" at -7660,1885 h40
  text "12" at -6815,1885 h40
  text "12" at -5025,1885 h40
  text "12" at -4235,1885 h40
  text "13" at -10965,1870 h40
  text "16" at -1800,1860 h40
  text "20" at -8510,1835 h40
  text "20" at -5895,1835 h40
  text "20" at -3470,1820 h40
  text "20" at -2625,1820 h40
  text "20" at -980,1815 h40
  text "16" at -11210,1795 h40
  text "5" at -8715,1765 h40
  text "16" at -10225,1750 h40
  text "16" at -7665,1735 h40
  text "16" at -6820,1735 h40
  text "16" at -5030,1735 h40
  text "16" at -4240,1735 h40
  text "17" at -10965,1715 h40
  text "20" at -1805,1695 h40
  text "24" at -8505,1680 h40
  text "24" at -5890,1680 h40
  text "24" at -3465,1665 h40
  text "24" at -2620,1665 h40
  text "24" at -975,1660 h40
  text "20" at -11215,1630 h40
  text "9" at -8715,1610 h40
  text "20" at -10230,1585 h40
  text "20" at -7670,1570 h40
  text "20" at -6825,1570 h40
  text "20" at -5035,1570 h40
  text "20" at -4245,1570 h40
  text "21" at -10965,1555 h40
  text "24" at -1800,1540 h40
  text "28" at -8505,1520 h40
  text "28" at -5890,1520 h40
  text "28" at -3465,1505 h40
  text "28" at -2620,1505 h40
  text "28" at -975,1500 h40
  text "24" at -11210,1475 h40
  text "13" at -8715,1455 h40
  text "24" at -10225,1430 h40
  text "24" at -7665,1415 h40
  text "24" at -6820,1415 h40
  text "24" at -5030,1415 h40
  text "24" at -4240,1415 h40
  text "25" at -10965,1395 h40
  text "28" at -1800,1380 h40
  text "32" at -8505,1360 h40
  text "32" at -5890,1360 h40
  text "32" at -3465,1345 h40
  text "32" at -2620,1345 h40
  text "32" at -975,1340 h40
  text "28" at -11210,1315 h40
  text "17" at -8715,1300 h40
  text "28" at -10225,1270 h40
  text "28" at -7665,1255 h40
  text "28" at -6820,1255 h40
  text "28" at -5030,1255 h40
  text "28" at -4240,1255 h40
  text "1" at -10789.57,1253.66 h50 r90
  text "29" at -10965,1240 h40
  text "32" at -1800,1220 h40
  text "36" at -8505,1205 h40
  text "36" at -5890,1205 h40
  text "36" at -3465,1190 h40
  text "36" at -2620,1190 h40
  text "36" at -975,1185 h40
  text "32" at -11210,1155 h40
  text "20" at -8900,1135 h40
  text "32" at -10225,1110 h40
  text "32" at -7665,1095 h40
  text "32" at -6820,1095 h40
  text "32" at -5030,1095 h40
  text "32" at -4240,1095 h40
  text "33" at -10965,1090 h40
  text "33" at -1625,1070 h40
  text "40" at -8505,1050 h40
  text "40" at -5890,1050 h40
  text "40" at -3465,1035 h40
  text "40" at -2620,1035 h40
  text "40" at -975,1030 h40
  text "36" at -11210,1000 h40
  text "33" at -7480,960 h40
  text "33" at -6635,945 h40
  text "33" at -4065,945 h40
  text "33" at -4855,940 h40
  text "37" at -10970,930 h40
  text "40" at -11210,845 h40
  text "1" at -6051.02,735 h50
Silkscreen Bottom:
  text "1" at -5577.52,2557.6 h50 r270
  text "1" at -2297.44,2553.74 h50 r270
  text "1" at -8198.5,2553.15 h50 r270
  text "1" at -3157.05,2547.95 h50 r270
  text "1" at -660.51,2541.26 h50 r270
  text "1" at -1497.2,2412.48 h50 r270
  text "1" at -10923.03,2349.09 h50 r270
  text "1" at -9910.43,2322.64 h50 r270
  text "1" at -7360.63,2294.72 h50 r270
  text "1" at -6504.21,2292.09 h50 r270
  text "1" at -3935.04,2289.06 h50 r270
  text "1" at -4722.52,2286.73 h50 r270
  text "1" at -8675,1935 h50 r270
Drill Drawing:
  lines w1: -11811.02,4100 -11811,4100

## Dimensions
-11811.02,4133.86 to 0,4133.86 on Silkscreen Top
-11811.02,0 to -11811.02,4133.86 on Silkscreen Top

## Text inside footprints (layer, text, board x,y; h text height)
CN11: Silkscreen Bottom "1" at -1571.02,3735 h60 r90
J1-3: Silkscreen Top "1" at -2786.02,3525 h60
J3-1: Silkscreen Top "1" at -1186.02,3545 h60
J5-3-1: Silkscreen Top "1" at -6206.02,3505 h60
J5-3-2: Silkscreen Top "1" at -6716.02,3510 h60
J5-4: Silkscreen Top "1" at -7256.02,3510 h60
J5-5: Silkscreen Top "1" at -5096.02,3500 h60
J11: Silkscreen Top "1" at -1985,3745 h60 r270
J12: Silkscreen Top "1" at -3311.02,3430 h60 r180